# EAGLE board Smart weather monitoring system (EAGLE 9.7.0)

Size 314.7 x 114.56 mm. Coordinates in mm from the lower left corner, seen from the top.
Outline: 0,0 314.7,0 314.7,114.56 0,114.56 0,0
Copper layers (1*16): Top 0.035mm / dielectric 1.5mm / Bottom 0.035mm
Design rules "default": minimum track width 6mil, minimum drill 0.35mm, track to track 6mil, track to pad 6mil, pad to pad 6mil, via to via 6mil, smd to smd 6mil, copper to edge 40mil, drill to drill 6mil, minimum pad ring 10mil, minimum via ring 8mil, stop-mask expansion 4mil, vias tented up to drill 0mil, thermal gap 10mil

## Footprints (pad centres in the part's own frame; a part is rotated, then mirrored left to right if it is on the bottom)
HC-SR04 = drill 1.016 long: 1 -3.81,0; 2 -1.27,0; 3 1.27,0; 4 3.81,0
MQ-XX-SOCKET = drill 1.27: 1 -6.223,6.223; 2 -8.788,0; 3 -6.223,-6.223; 4 6.223,-6.223; 5 8.788,0; 6 6.223,6.223
PIEZO = drill 1 pad 1.6: 1 -3.5,0; 2 3.5,0
RESAD1016W63L850D250B = drill 0.83 pad 1.43: 1 -5.08,0; 2 5.08,0
HA-06-SM065 = drill 1 pad 1.676: 1 -2.54,-2.54; 2 0,2.54; 3 2.54,-2.54
ARDUINO-UNO-R3-SHIELD = drill 1.016 pad 1.88: 3.3V 24.13,-2.54; 5V 24.13,0; A0 24.13,12.7; A1 24.13,15.24; A2 24.13,17.78; A3 24.13,20.32; A4 24.13,22.86; A5 24.13,25.4; AREF -24.13,-13.97; D2 -24.13,20.32; D3 -24.13,17.78; D4 -24.13,15.24; D5 -24.13,12.7; D6 -24.13,10.16; D7 -24.13,7.62; D8 -24.13,3.81; D9 -24.13,1.27; D10 -24.13,-1.27; D11 -24.13,-3.81; D12 -24.13,-6.35; D13 -24.13,-8.89; GND@0 24.13,2.54; GND@1 24.13,5.08; GND@2 -24.13,-11.43; IOREF 24.13,-7.62; NC 24.13,-10.16; RES 24.13,-5.08; RX -24.13,25.4; SCL -24.13,-19.05; SDA -24.13,-16.51; TX -24.13,22.86; VIN 24.13,7.62
TO92 = drill 0.813 octagon: 1 -1.27,0; 2 0,1.905; 3 1.27,0
1X08 = drill 1.016 long: 1 -8.89,0; 2 -6.35,0; 3 -3.81,0; 4 -1.27,0; 5 1.27,0; 6 3.81,0; 7 6.35,0; 8 8.89,0
JHD-162A = drill 1.016 long: 1 -19.05,0; 2 -16.51,0; 3 -13.97,0; 4 -11.43,0; 5 -8.89,0; 6 -6.35,0; 7 -3.81,0; 8 -1.27,0; 9 1.27,0; 10 3.81,0; 11 6.35,0; 12 8.89,0; 13 11.43,0; 14 13.97,0; 15 16.51,0; 16 19.05,0

## Placement (x,y rotation side)
DIST1  DISTANCE-SENSOR-4PINHC-SR04  [HC-SR04]  234.66,100.99 0 top
GAS1  GAS-SENSORMQ-XX-SOCKET  [MQ-XX-SOCKET]  175.41,12.92 270 top
PIEZO1  PIEZO  [PIEZO]  204.76,23.42 180 top
R1  1k  [RESAD1016W63L850D250B]  130.06,66.57 270 top
R2  1k  [RESAD1016W63L850D250B]  136.71,66.01 270 top
R3  1k  [RESAD1016W63L850D250B]  175.29,35.47 180 top
R4  1k  [RESAD1016W63L850D250B]  275.86,72.22 90 top
R5  325k  [RESAD1016W63L850D250B]  152.44,10.16 270 top
RPOT1  250k  [HA-06-SM065]  71.62,11.42 0 top
U1  ARDUINO-UNO-R3-SHIELD  [ARDUINO-UNO-R3-SHIELD]  47.88,84.71 270 top
U2  TMP36GT9Z_TO92  [TO92]  152.42,60.76 0 top
U3  PINHD-1X08_1X08M  [1X08]  147.51,105.67 0 top
U4  LCD-16X2JHD-162A  [JHD-162A]  259.07,63.27 0 top

## Library data of the parts
DIST1 GAS1 PIEZO1 R1-R5 RPOT1 U1-U4 = Tinkercad

## Nets
R2_1: R1.2 R2.1 U3.8
RPOT1_P$1: R5.2 RPOT1.1
U1_5V: DIST1.1 GAS1.4 GAS1.5 GAS1.6 R4.2 R5.1 U1.5V U2.3 U4.2
U1_A0: U1.A0 U2.2
U1_A1: GAS1.1 GAS1.3 R3.2 U1.A1
U1_A2: RPOT1.2 U1.A2
U1_D2: U1.D2 U4.6
U1_D3: U1.D3 U4.14
U1_D4: U1.D4 U4.13
U1_D5: U1.D5 U4.12
U1_D6: U1.D6 U4.11
U1_D7: PIEZO1.1 U1.D7
U1_D8: U1.D8 U4.4
U1_D9: DIST1.3 U1.D9
U1_D10: DIST1.2 U1.D10
U1_GND: DIST1.4 GAS1.2 PIEZO1.2 R2.2 R3.1 RPOT1.3 U1.GND@0 U1.GND@1 U1.GND@2 U2.1 U3.2 U4.1 U4.3 U4.5 U4.16
U1_RX: U1.RX U3.3
U1_TX: R1.1 U1.TX
U3_5: U1.3.3V U3.1 U3.4 U3.5
U4_LED+: R4.1 U4.15

## Tracks (layer width: path | path; a pad name or v marks a point on that pad's centre or on a via)
R2_1  (2 unrouted)
RPOT1_P$1  (1 unrouted)
U1_5V  (8 unrouted)
U1_A0  (1 unrouted)
U1_A1  (3 unrouted)
U1_A2  (1 unrouted)
U1_D2  (1 unrouted)
U1_D3  (1 unrouted)
U1_D4  (1 unrouted)
U1_D5  (1 unrouted)
U1_D6  (1 unrouted)
U1_D7  (1 unrouted)
U1_D8  (1 unrouted)
U1_D9  (1 unrouted)
U1_D10  (1 unrouted)
U1_GND  (14 unrouted)
U1_RX  (1 unrouted)
U1_TX  (1 unrouted)
U3_5  (3 unrouted)
U4_LED+  (1 unrouted)